# EAGLE board delay_v03 (EAGLE 6.2)
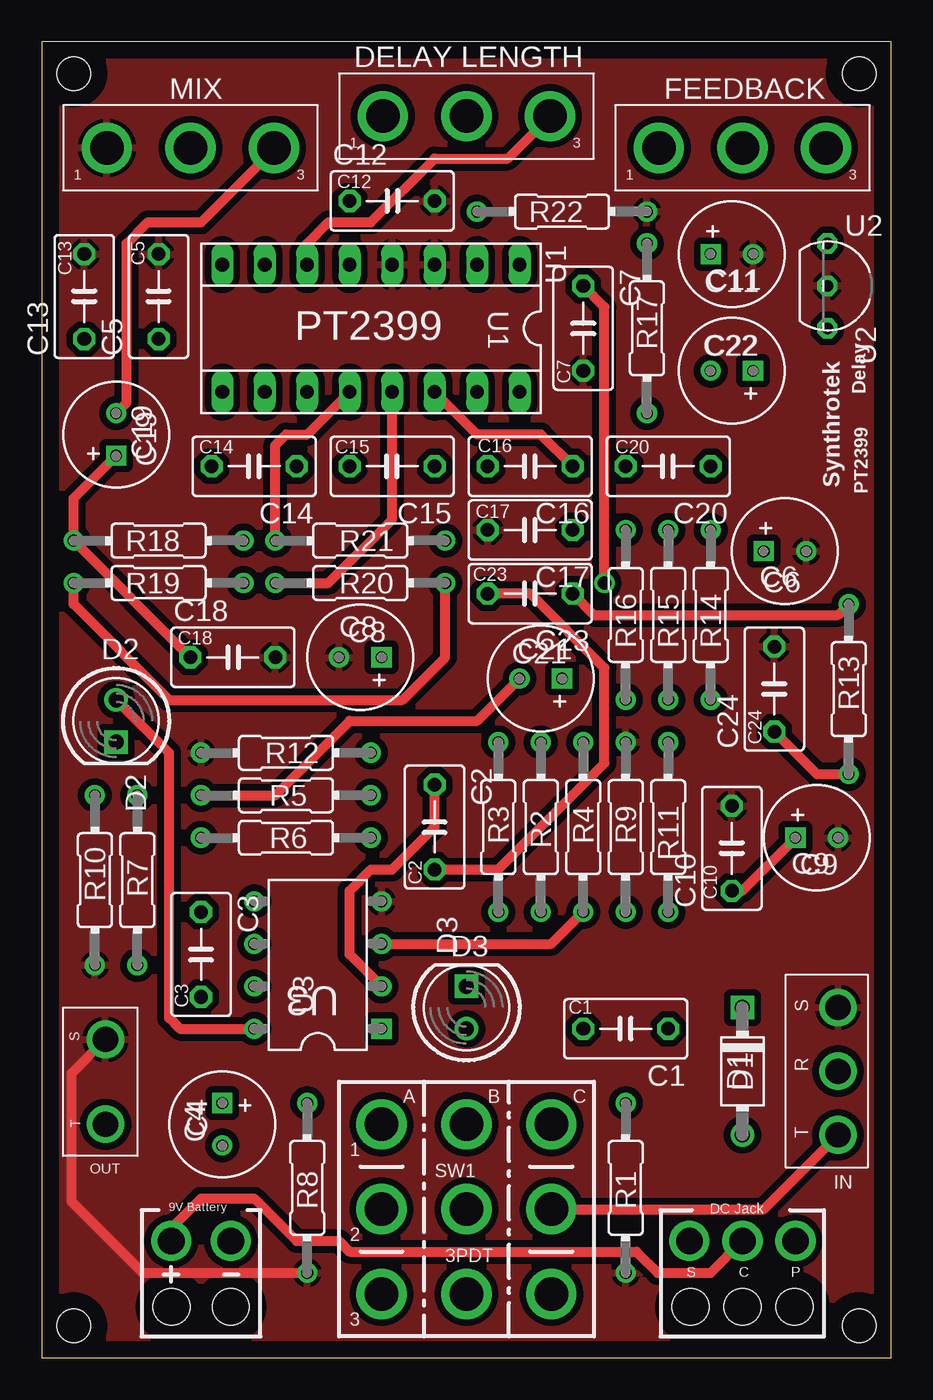
[diagram p0: board, top side]
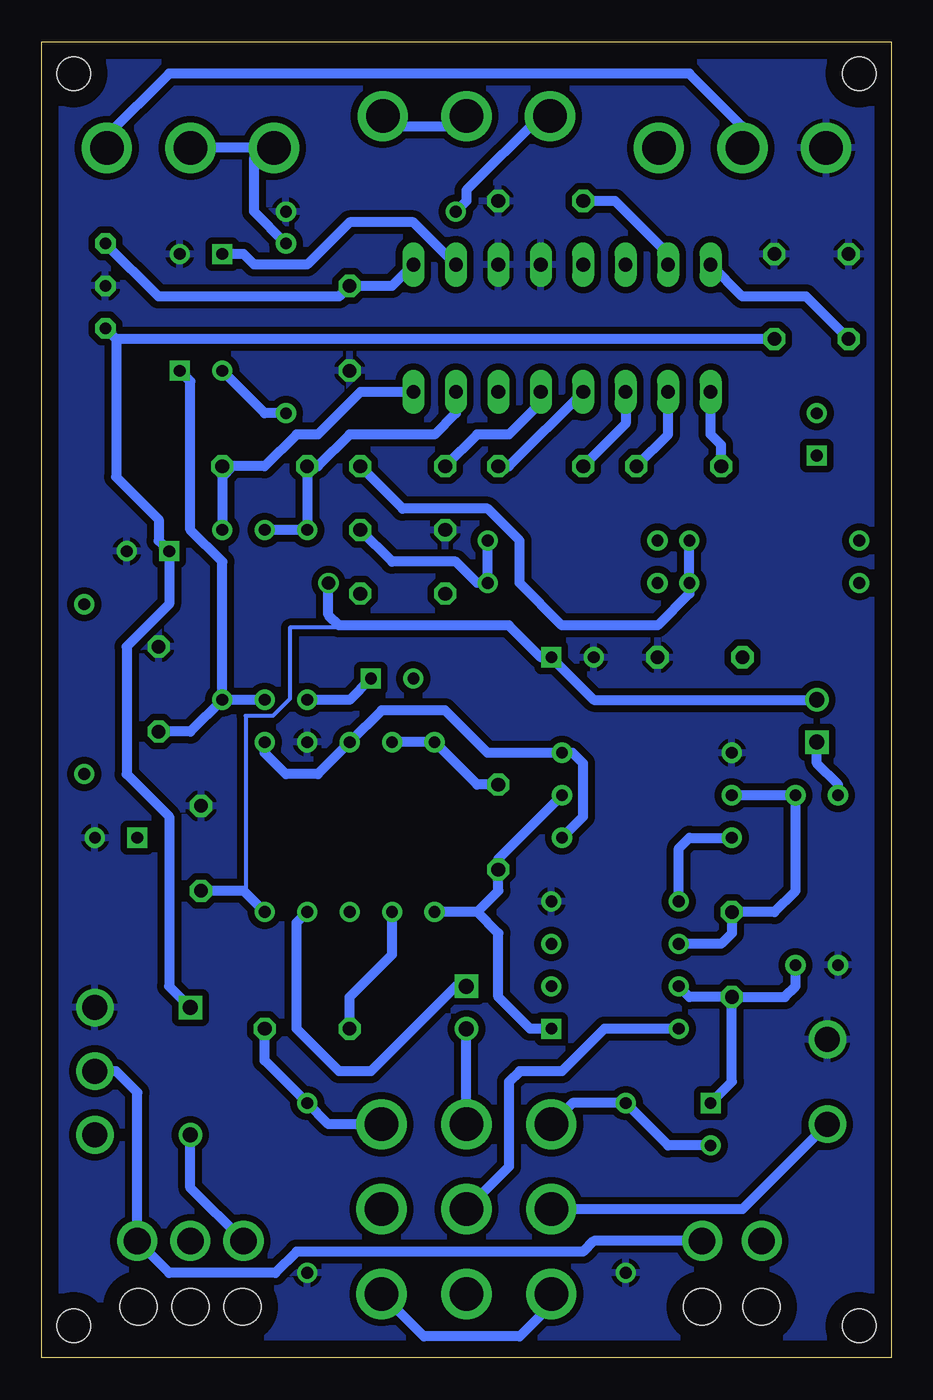
[diagram p1: board, bottom side, seen from below]

Size 50.8 x 78.74 mm. Coordinates in mm from the lower left corner, seen from the top.
Outline: 0,0 50.8,0 50.8,78.74 0,78.74 0,0
Copper layers (1*16): Top 0.035mm / dielectric 1.5mm / Bottom 0.035mm
Design rules: minimum track width 10mil, minimum drill 24mil, track to track 12mil, track to pad 8mil, pad to pad 8mil, via to via 8mil, smd to smd 8mil, copper to edge 40mil, drill to drill 8mil, minimum pad ring 10mil, minimum via ring 8mil, stop-mask expansion 4mil, vias tented up to drill 0mil, thermal gap 10mil
Holes 2 mm at 48.9,1.91 48.9,76.83 1.91,76.83 1.91,1.91

## Footprints (pad centres in the part's own frame; a part is rotated, then mirrored left to right if it is on the bottom)
C050-035X075 = drill 0.813 octagon: 1 -2.54,0; 2 2.54,0
063_025 = drill 0.7 square: + -1.27,0 | drill 0.7: - 1.27,0
DO41-3 = drill 0.9: A 3.81,0 | drill 0.9 square: C -3.81,0
LED5MM = drill 0.9: A -1.27,0 | drill 0.9 square: K 1.27,0
STEREO_JACK = drill 1.5: R 0,0; S 3.81,0; T -3.81,0
MONO_JACK = drill 1.5: SLEEVE 2.54,0; TIP -2.54,0
POT = drill 2: 1 -5,0; 2 0,0; 3 5,0
RESISTOR = drill 0.7: 1 -5.08,0; 2 5.08,0
3PDT = drill 2: A1 -5.08,5.08; A2 -5.08,0; A3 -5.08,-5.08; B1 0,5.08; B2 0,0; B3 0,-5.08; C1 5.08,5.08; C2 5.08,0; C3 5.08,-5.08
SOCKET-16 = drill 0.813 long: 1 -8.89,-3.81; 2 -6.35,-3.81; 3 -3.81,-3.81; 4 -1.27,-3.81; 5 1.27,-3.81; 6 3.81,-3.81; 7 6.35,-3.81; 8 8.89,-3.81; 9 8.89,3.81; 10 6.35,3.81; 11 3.81,3.81; 12 1.27,3.81; 13 -1.27,3.81; 14 -3.81,3.81; 15 -6.35,3.81; 16 -8.89,3.81
TO-92 = drill 0.7 octagon: 1 -2.54,0; 2 0,0; 3 2.54,0
DIL08 = drill 0.7 square: 1 -3.81,-3.81 | drill 0.7: 2 -1.27,-3.81; 3 1.27,-3.81; 4 3.81,-3.81; 5 3.81,3.81; 6 1.27,3.81; 7 -1.27,3.81; 8 -3.81,3.81
DC_JACK_OFFBOARD = drill 1.6: CONNECT 0,1.27; PIN 3.175,1.27; SLEEVE -3.175,1.27 | hole 2.2: -3.111,-2.667; 0,-2.667; 3.111,-2.667
9V_BATTERY = drill 1.6: 9V_BATTERY_+ -1.778,1.27; 9V_BATTERY_- 1.778,1.27 | hole 2.2: -1.778,-2.667; 1.778,-2.667

## Placement (x,y rotation side)
C1  0.1uF  [C050-035X075]  34.92,19.68 180 top
C2  0.1uF  [C050-035X075]  23.5,31.75 270 top
C3  1nF  [C050-035X075]  9.53,24.13 270 top
C4  1uF  [063_025]  10.79,13.97 270 top
C5  0.1uF  [C050-035X075]  6.99,63.5 90 top
C6  47uF  [063_025]  44.45,48.26 0 top
C7  0.1uF  [C050-035X075]  32.38,61.59 270 top
C8  100uF  [063_025]  19.05,41.91 180 top
C9  47uF  [063_025]  46.35,31.11 0 top
C10  0.1uF  [C050-035X075]  41.27,30.48 90 top
C11  47uF  [063_025]  41.27,66.04 0 top
C12  0.1uF  [C050-035X075]  20.95,69.22 0 top
C13  0.1uF  [C050-035X075]  2.54,63.5 90 top
C14  82nF  [C050-035X075]  12.7,53.34 180 top
C15  82nF  [C050-035X075]  20.95,53.34 180 top
C16  560pF  [C050-035X075]  29.21,53.34 180 top
C17  3.3nF  [C050-035X075]  29.21,49.53 180 top
C18  0.01uF  [C050-035X075]  11.43,41.91 0 top
C19  4.7uF  [063_025]  4.45,55.24 90 top
C20  560pF  [C050-035X075]  37.47,53.34 180 top
C21  10uF  [063_025]  29.84,40.64 180 top
C22  4.7uF  [063_025]  41.27,59.05 180 top
C23  4.7uF  [C050-035X075]  29.21,45.72 180 top
C24  3.9n  [C050-035X075]  43.81,40.01 90 top
D1  1n4148  [DO41-3]  41.91,17.14 270 top
D2  LED5MM  [LED5MM]  4.45,38.1 270 top
D3  LED5MM  [LED5MM]  25.4,20.95 90 top
IN  STEREO_JACK  [STEREO_JACK]  47.62,17.14 90 top
OUT  MONO_JACK  [MONO_JACK]  3.81,16.51 90 top
POT1  [POT]  25.4,74.3 0 top
POT2  [POT]  8.89,72.39 0 top
POT3  [POT]  41.91,72.39 0 top
R1  1M  [RESISTOR]  34.92,10.16 90 top
R2  10k  [RESISTOR]  29.84,31.75 90 top
R3  10k  [RESISTOR]  27.3,31.75 270 top
R4  1M  [RESISTOR]  32.38,31.75 270 top
R5  10k  [RESISTOR]  14.61,33.66 180 top
R6  1M  [RESISTOR]  14.61,31.11 180 top
R7  10k  [RESISTOR]  5.71,28.57 270 top
R8  1M  [RESISTOR]  15.88,10.16 90 top
R9  470  [RESISTOR]  34.92,31.75 270 top
R10  470  [RESISTOR]  3.17,28.57 90 top
R11  10k  [RESISTOR]  37.47,31.75 270 top
R12  10k  [RESISTOR]  14.61,36.2 0 top
R13  15k  [RESISTOR]  48.26,40.01 90 top
R14  10k  [RESISTOR]  40.01,44.45 270 top
R15  10k  [RESISTOR]  37.47,44.45 270 top
R16  10k  [RESISTOR]  34.92,44.45 270 top
R17  3.3k  [RESISTOR]  36.2,61.59 90 top
R18  5.6k  [RESISTOR]  6.99,48.9 180 top
R19  10k  [RESISTOR]  6.99,46.35 180 top
R20  15k  [RESISTOR]  19.05,46.35 0 top
R21  10k  [RESISTOR]  19.05,48.9 0 top
R22  1k  [RESISTOR]  31.11,68.58 180 top
SW1  3PDT  [3PDT]  25.4,8.89 0 top
U1  PT2399  [SOCKET-16]  19.68,61.59 180 top
U2  78L05ACZ  [TO-92]  46.99,64.14 270 top
U3  NE5532N  [DIL08]  16.51,23.5 90 top
U$1  DC_JACK_OFFBOARD  [DC_JACK_OFFBOARD]  41.91,5.71 0 top
U$2  9V_BATTERY_CLIP  [9V_BATTERY]  9.53,5.71 0 top

## Library data of the parts
C1-C3 C5 C7 C10 C12-C18 C20 C23 C24 = resistor
C4 C6 C8 C9 C11 C19 C21 C22 = gm-caps-electro-pol
D1-D3 = gm-diodes
IN OUT POT1-POT3 R1-R22 SW1 U2 U$1 U$2 = 00_steve
U1 = ic-package
U3 = gm-ics

## Nets
9V: C5.1 C6.+ D1.C U2.3
BYPASS: SW1.A3 SW1.C3
C5*: C13.1 U1.8
DELAY_IN: C2.2 C23.2 R3.2 R5.1 U3.1
DELAY_OUT: C3.1 C21.- R5.2 R7.1 U3.6
DELAY_OUT_UNBUFFERED: R6.2 U3.5
GND: C5.2 C6.- C7.2 C8.- C9.- C10.2 C11.- C12.2 C13.2 C17.2 C18.2 C24.2 IN.S OUT.SLEEVE POT2.1 R1.1 R8.1 R9.1 R10.1 R12.1 R22.1 U1.3 U1.4 U2.2 U3.4
JACKSW: IN.R U$1.PIN U$2.9V_BATTERY_-
N$1: C23.1 R13.2
N$2: C12.1 U1.7
N$3: C14.2 U1.9
N$4: C14.1 U1.10
N$5: C17.1 R19.2 R20.2 R21.2
N$6: C15.1 R21.1 U1.12
N$7: POT1.2 POT1.3 U1.6
N$9: C11.+ U1.2
N$10: C1.1 R1.2 SW1.C1
N$11: POT1.1 R22.2
N$12: C16.2 R20.1 U1.13
N$13: OUT.TIP SW1.A2
N$14: C20.2 R15.1 R16.1 U1.15
N$15: C20.1 R14.1 U1.16
N$16: C18.1 C19.+ R18.2
N$17: C15.2 U1.11
N$18: C2.1 R2.2 R3.1 U3.2
N$19: C19.- POT2.3
N$20: C22.+ C24.1 R13.1 R14.2 R15.2
N$21: C22.- R17.1
N$22: C1.2 R2.1
N$24: POT2.2 POT3.3
N$25: C21.+ R16.2
N$26: C16.1 R18.1 R19.1 U1.14
N$27: D3.A SW1.B1
N$28: C3.2 C4.+ R7.2 U3.7
N$29: D2.K R10.2
N$30: D1.A U$1.SLEEVE
N$31: IN.T SW1.C2
N$32: C4.- R8.2 SW1.A1
N$33: U$1.CONNECT U$2.9V_BATTERY_+
N$34: D3.K R9.2
N$35: POT3.1 POT3.2 R17.2
N$36: R4.2 U3.3
VA: C7.1 C8.+ C9.+ C10.1 D2.A R11.2 SW1.B2 U1.1 U2.1 U3.8
VREF: R4.1 R6.1 R11.1 R12.2

## Tracks (layer width: path | path; a pad name or v marks a point on that pad's centre or on a via)
9V
  Bottom 0.61: C5.1 46.35,60.96 | 46.35,60.96 U2.3 | 46.35,60.96 46.35,52.7 43.81,50.16 43.81,48.9 C6.+ 43.18,45.09 45.72,42.55 45.72,34.92 43.18,32.38 43.18,22.23 D1.C
BYPASS
  Bottom 0.61: SW1.A3 20.32,3.17 22.23,1.27 27.94,1.27 SW1.C3
C5*
  Bottom 0.61: C13.1 5.08,63.5 8.89,63.5 U1.8
DELAY_IN
  Top 0.61: C2.2 27.3,29.21 33.66,35.56 33.66,41.27 29.21,45.72 C23.2
  Bottom 0.61: U3.1 21.59,19.68 23.5,21.59 23.5,25.4 24.77,26.67 | 24.77,26.67 R3.2 | 24.77,26.67 23.5,27.94 C2.2 23.5,29.84 R5.1
DELAY_OUT
  Top 0.61: R5.2 13.97,33.66 18.41,38.1 26.04,38.1 C21.-
  Bottom 0.61: U3.6 10.16,24.77 9.53,25.4 C3.1 6.99,26.67 5.71,27.94 R7.1 R5.2
DELAY_OUT_UNBUFFERED
  Bottom 0.61: R6.2 12.06,31.11 12.7,30.48 U3.5
GND
  Top 0.61: R8.1 6.03,5.08 1.78,9.34 1.78,17.02 OUT.SLEEVE
  pour Bottom (isolate 0.406): 0,78.74 50.8,78.74 50.8,0 0,0
  pour Top (isolate 0.406): 0,78.74 50.8,78.74 50.8,0 0,0
JACKSW
  Bottom 0.61: U$2.9V_BATTERY_- 17.78,6.99 18.41,6.35 35.56,6.35 36.83,5.08 43.18,5.08 U$1.PIN 45.09,15.88 46.35,17.14 IN.R
N$1
  Top 0.61: C23.1 33.02,44.45 47.62,44.45 R13.2
N$2
  Bottom 0.61: U1.7 13.34,66.04 16.51,69.22 C12.1
N$3
  Bottom 0.61: U1.9 10.79,55.24 10.16,54.61 C14.2
N$4
  Bottom 0.61: U1.10 13.34,55.24 C14.1
N$5
  Top 0.61: R19.2 1.91,45.09 7.62,39.37 21.59,39.37 24.13,41.91 R20.2
  Bottom 0.61: R21.2 R20.2 24.77,46.35 26.04,47.62 29.84,47.62 C17.1
N$6
  Top 0.61: U1.12 15.88,55.24 14.61,55.24 13.97,54.61 R21.1
  Bottom 0.61: U1.12 22.86,53.34 C15.1
N$7
  Top 0.61: U1.6 15.88,66.67 17.14,67.94 19.68,67.94 23.5,71.75 27.86,71.75 POT1.3
  Bottom 0.61: POT1.2 26.04,73.66 29.77,73.66 POT1.3
N$9
  Bottom 0.61: C11.+ 38.73,66.04 38.1,65.41 34.92,65.41 32.38,67.94 28.57,67.94 U1.2
N$10
  Bottom 0.61: SW1.C1 33.66,13.97 R1.2 37.47,17.78 C1.1
N$11
  Bottom 0.61: POT1.1 20.95,74.3 25.4,69.85 25.4,69.22 R22.2
N$12
  Top 0.61: R20.1 17.14,46.35 20.95,50.16 U1.13
  Bottom 0.61: U1.13 20.95,57.15 22.86,55.24 24.77,55.24 C16.2
N$13
  Bottom 0.61: SW1.A2 8.89,8.89 OUT.TIP
N$14
  Bottom 0.61: R15.1 R16.1 C20.2 34.29,53.34 32.38,55.24 27.3,55.24 26.04,56.52 U1.15
N$15
  Bottom 0.61: 40.01,52.7 R14.1 | 40.01,52.7 C20.1 | U1.16 31.75,57.78 34.29,55.24 35.56,55.24 37.47,53.34 39.37,53.34 40.01,52.7
N$16
  Top 0.61: C19.+ 1.91,51.44 R18.2 C18.1
N$17
  Bottom 0.61: U1.11 15.88,55.88 C15.2
N$18
  Top 0.61: U3.2 18.41,24.13 18.41,27.94 19.68,29.21 20.95,29.21 23.5,31.75 C2.1
  Bottom 0.61: C2.1 24.77,34.29 R3.1 R2.2
N$19
  Top 0.61: POT2.3 13.89,72.31 9.53,67.94 6.35,67.94 5.08,66.67 5.08,57.15 C19.-
N$20
  Top 0.61: R13.1 46.35,34.92 C24.1
  Bottom 0.61: C24.1 41.91,37.47 R14.2 | R15.2 R14.2 | R14.2 40.01,47.62 41.91,49.53 41.91,58.42 C22.+
N$21
  Bottom 0.61: R17.1 37.47,56.52 C22.-
N$22
  Bottom 0.61: C1.2 32.38,21.59 29.84,24.13 R2.1
N$24
  Bottom 0.61: POT2.2 8.89,73.66 12.06,76.83 43.18,76.83 46.99,73.03 46.99,72.47 POT3.3
N$25
  Bottom 0.61: R16.2 32.38,39.37 C21.+
N$26
  Top 0.61: U1.14 26.04,55.24 29.84,55.24 C16.1
  Bottom 0.61: R18.1 R19.1 12.06,45.72 13.97,43.81 19.68,43.81 22.23,46.35 22.23,48.9 24.13,50.8 29.21,50.8 C16.1
N$27
  Bottom 0.61: SW1.B1 D3.A
N$28
  Bottom 0.61: C4.+ 9.53,16.51 C3.2 | C3.2 12.06,21.59 U3.7 | C3.2 6.35,21.59 5.71,22.23 R7.2
N$29
  Bottom 0.61: R10.2 3.17,34.29 4.45,35.56 D2.K
N$30
  Bottom 0.61: U$1.SLEEVE 41.91,10.16 D1.A
N$31
  Top 0.61: SW1.C2 43.18,8.89 IN.T
N$32
  Bottom 0.61: C4.- 13.34,12.7 R8.2 19.05,15.24 SW1.A1
N$33
  Top 0.61: U$2.9V_BATTERY_+ 7.75,7.75 9.53,9.53 12.7,9.53 15.24,6.99 17.78,6.99 18.41,6.35 35.56,6.35 36.83,5.08 40.01,5.08 U$1.CONNECT
N$34
  Bottom 0.61: D3.K 26.04,22.23 31.11,17.14 33.02,17.14 35.56,19.68 35.56,26.04 R9.2
N$35
  Bottom 0.61: R17.2 38.1,68.58 38.1,71.2 | 38.1,71.2 POT3.1 | 38.1,71.2 38.1,71.75 37.47,72.39 POT3.2
N$36
  Top 0.61: U3.3 30.48,24.77 R4.2
VA  (via drill 0.8)
  Top 0.61: v33.66,46.35 33.66,62.87 C7.1 | U3.8 8.26,19.68 7.62,20.32 7.62,36.2 D2.A | C10.1 41.91,27.94 C9.+
  Bottom 0.254: 38.72,27.93 38.61,28.04 38.61,38.41 36.98,38.41 35.97,39.42 35.97,43.69 33.12,43.69 33.02,43.81
  Bottom 0.61: U2.1 43.81,63.5 33.02,63.5 C7.1 29.84,64.14 U1.1 | v33.66,46.35 33.66,44.45 33.02,43.81 22.86,43.81 20.95,41.91 C8.+ 17.78,39.37 D2.A | C10.1 38.73,27.94 38.72,27.93 R11.2 | U3.8 17.14,19.68 19.68,17.14 22.23,17.14 22.86,16.51 22.86,11.43 SW1.B2
VREF
  Bottom 0.61: R6.1 18.41,32.38 18.41,35.56 19.05,36.2 R12.2 24.13,36.2 26.67,38.73 30.48,38.73 R4.1 34.29,34.92 36.2,34.92 37.47,36.2 R11.1

## Text on the board
tPlace: DELAY LENGTH | MIX | FEEDBACK | C12 | C5 | U2 | C13 | C11 | U1 | PT2399 | C22 | C7 | Delay | C16 | C14 | C15 | C20 | C19 | Synthrotek | PT2399 | C17 | C23 | C6 | C18 | C8 | D2 | C21 | C24 | C9 | C2 | C10 | D3 | U3 | C3 | C1 | D1 | C4